# EAGLE board Quest Game Through Hole Single PCB Design (EAGLE 9.7.0)
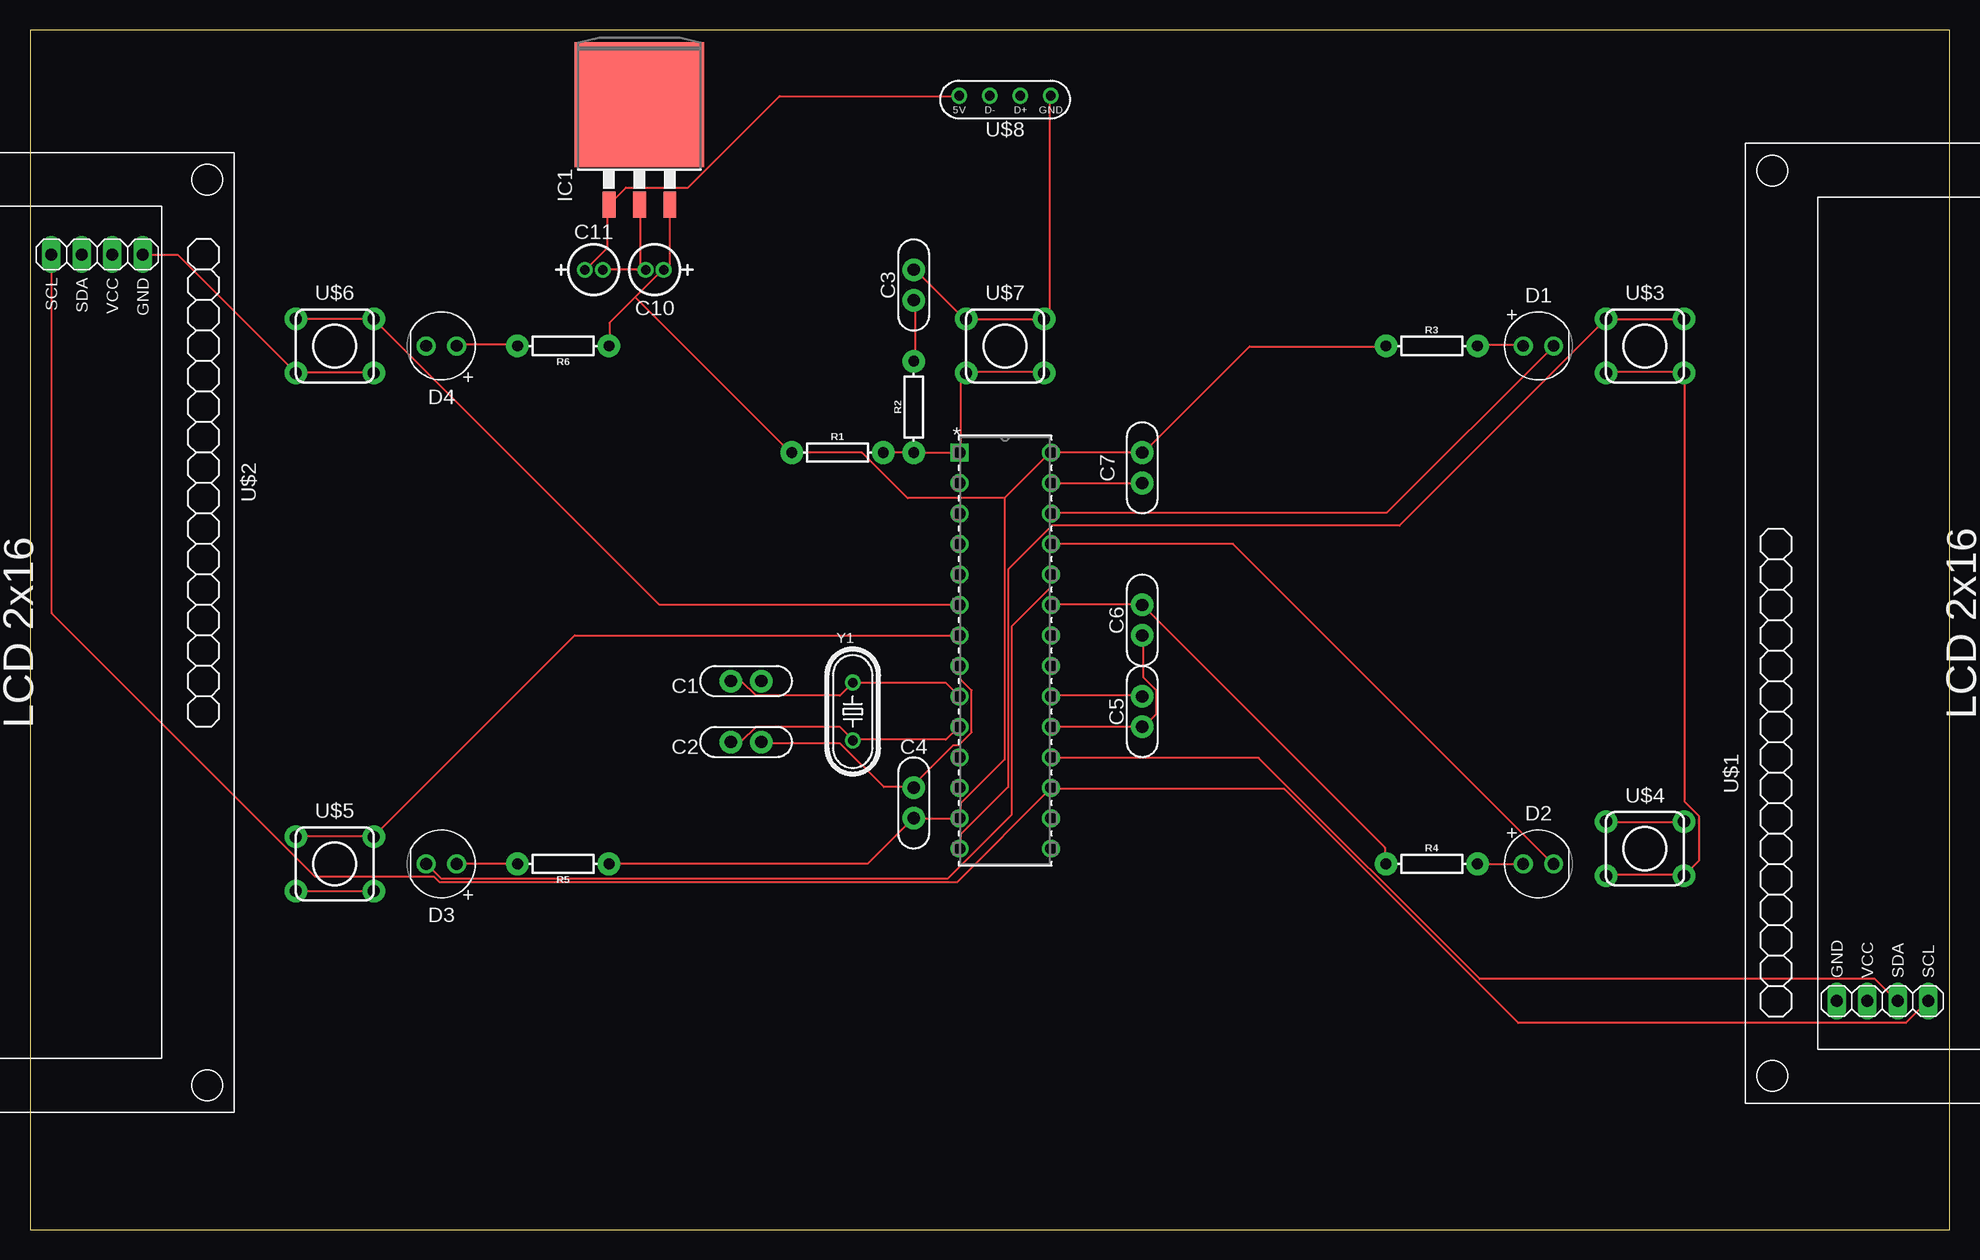
[diagram p0: board, top side]
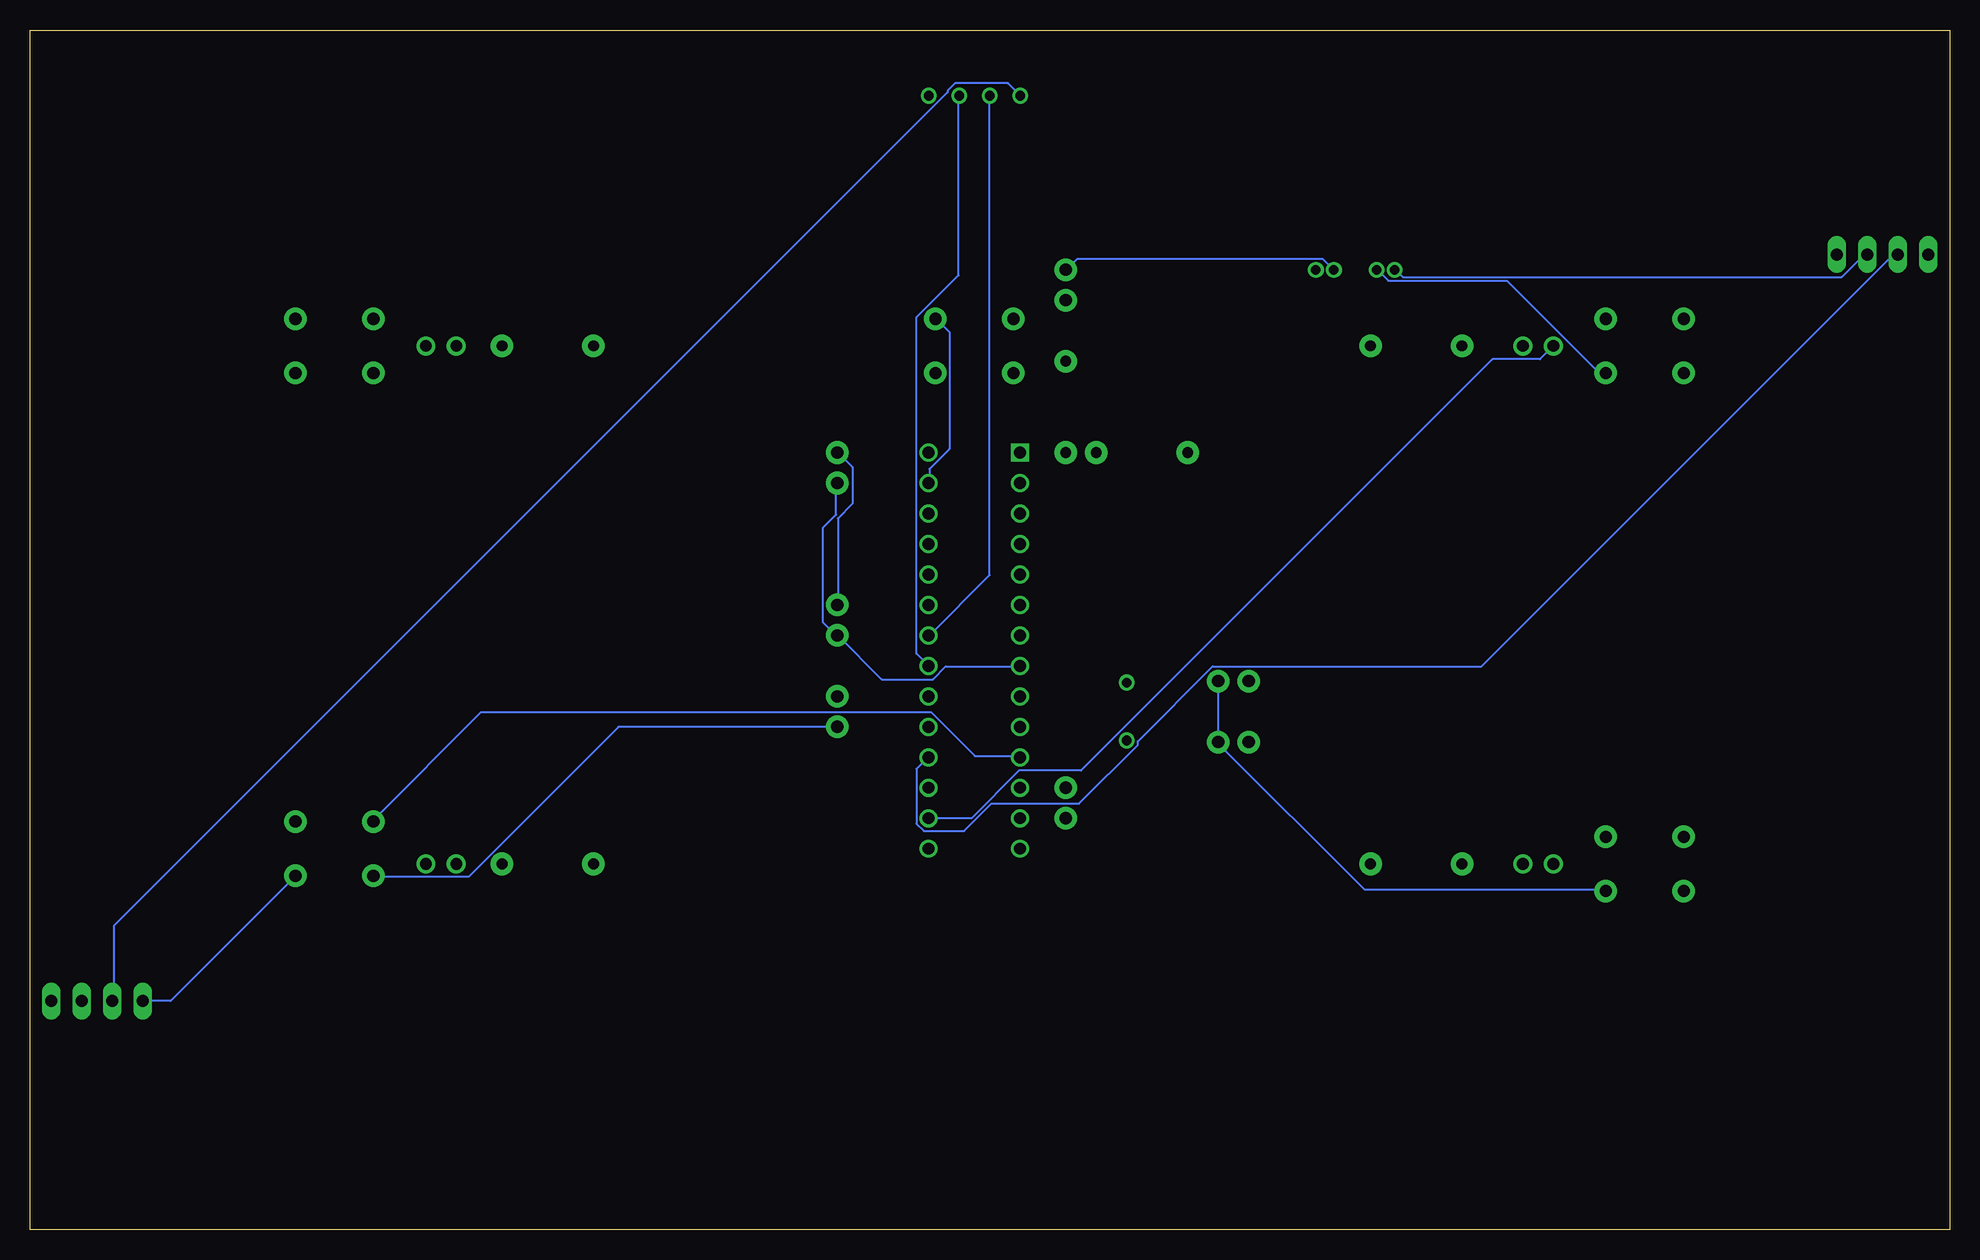
[diagram p1: board, bottom side, seen from below]

Size 160 x 100 mm. Coordinates in mm from the lower left corner, seen from the top.
Outline: 0,0 160,0 160,100 0,100 0,0
Copper layers (1*16): Top / Bottom
Stack-up Default Layer Stack: Top SilkScreen Epoxy Ink / Top SolderMask SR:Green 0.0254mm Dk 4.3 / Top Surface Finish Lead-Free 0.02mm / Top CuFoil:007 0.035mm / Dielectric-1 User Defined 1.5mm / Bottom CuFoil:007 0.035mm / Bottom Surface Finish Lead-Free 0.02mm / Bottom SolderMask SR:Green 0.0254mm Dk 4.3 / Bottom SilkScreen Epoxy Ink
Design rules: minimum copper width 6mil, minimum drill size 0.35mm, copper clearance wire_polygon to wire_polygon 6mil, copper clearance wire_polygon to pad_smd 6mil, copper clearance wire_polygon to via 6mil, copper clearance pad_smd to pad_smd 6mil, copper clearance pad_smd to via 6mil, copper clearance via to via 6mil, copper clearance smd to pad (same net) 6mil, copper clearance smd to via (same net) 6mil, copper clearance smd to smd (same net) 6mil, restrict clearance 0mil, dimension clearance 40mil, via restrict clearance 0mil, drill distance 6mil, keepout clearance 0mil

## Footprints (pad centres in the part's own frame; a part is rotated, then mirrored left to right if it is on the bottom)
CAP-THRU-2.54MM = drill 1.016 pad 1.88: 1 -1.27,0; 2 1.27,0
CAPPRD150W80D400H600B = drill 0.8: 1 -0.75,0; 2 0.75,0
LEDRD254W60D565H860B_W = drill 0.981 pad 1.581: 1 -1.27,0; 2 1.27,0
TO263-3 = smd 1.067 x 2.159: 1 -2.54,-5.791; 2 0,-5.791; 3 2.54,-5.791 | smd 10.8 x 10.41: TAB 0,2.54
AXIAL-0.3 = drill 0.9 pad 1.88: P$1 -3.81,0; P$2 3.81,0
SPDIP28_300MC_MCH = drill 0.991 pad 1.499 square: 1 0,0 | drill 0.991 pad 1.499: 2 0,-2.54; 3 0,-5.08; 4 0,-7.62; 5 0,-10.16; 6 0,-12.7; 7 0,-15.24; 8 0,-17.78; 9 0,-20.32; 10 0,-22.86; 11 0,-25.4; 12 0,-27.94; 13 0,-30.48; 14 0,-33.02; 15 7.62,-33.02; 16 7.62,-30.48; 17 7.62,-27.94; 18 7.62,-25.4; 19 7.62,-22.86; 20 7.62,-20.32; 21 7.62,-17.78; 22 7.62,-15.24; 23 7.62,-12.7; 24 7.62,-10.16; 25 7.62,-7.62; 26 7.62,-5.08; 27 7.62,-2.54; 28 7.62,0
LCD-I2C = drill 1.016 long: 1 -19.05,-5.08; 2 -19.05,-7.62; 3 -19.05,-10.16; 4 -19.05,-12.7
SWITCH-MOMENTARY-PTH-6.5MM = drill 1.016 pad 1.88: 1 -3.251,2.261; 2 3.251,2.261; 3 -3.251,-2.261; 4 3.251,-2.261
USB-A = drill 0.8: 1 -3.81,0; 2 -1.27,0; 3 1.27,0; 4 3.81,0
HC49US = drill 0.813: 1 -2.413,0; 2 2.413,0

## Placement (x,y rotation side)
C1  22pF  [CAP-THRU-2.54MM]  59.69,45.72 0 top
C2  22pF  [CAP-THRU-2.54MM]  59.69,40.64 0 top
C3  104 Ceramic  [CAP-THRU-2.54MM]  73.66,78.74 90 top
C4  104 Ceramic  [CAP-THRU-2.54MM]  73.66,35.56 270 top
C5  106 Ceramic Low ESR  [CAP-THRU-2.54MM]  92.71,43.18 90 top
C6  104 Ceramic  [CAP-THRU-2.54MM]  92.71,50.8 90 top
C7  104 Ceramic  [CAP-THRU-2.54MM]  92.71,63.5 270 top
C10  0.1µF  [CAPPRD150W80D400H600B]  52.07,80.01 180 top
C11  10µF  [CAPPRD150W80D400H600B]  46.99,80.01 0 top
D1  P1 Select Button LED  [LEDRD254W60D565H860B_W]  125.73,73.66 0 top
D2  P1 Next Button LED  [LEDRD254W60D565H860B_W]  125.73,30.48 0 top
D3  P2 Select Button LED  [LEDRD254W60D565H860B_W]  34.29,30.48 180 top
D4  P2 Next Button LED  [LEDRD254W60D565H860B_W]  34.29,73.66 180 top
IC1  LD1117_TO263  [TO263-3]  50.8,91.24 0 top
R1  10kΩ  [AXIAL-0.3]  67.31,64.77 0 top
R2  1kΩ  [AXIAL-0.3]  73.66,68.58 90 top
R3  470Ω  [AXIAL-0.3]  116.84,73.66 0 top
R4  470Ω  [AXIAL-0.3]  116.84,30.48 0 top
R5  470Ω  [AXIAL-0.3]  44.45,30.48 180 top
R6  470Ω  [AXIAL-0.3]  44.45,73.66 180 top
U1  PIC32MX270F256B-50I/SPSPDIP28_300MC_MCH  [SPDIP28_300MC_MCH]  77.47,64.77 0 top
U$1  LCD-16X2-I2CSUNFOUNDER-IIC  [LCD-I2C]  145.52,38.1 90 top
U$2  LCD-16X2-I2CSUNFOUNDER-IIC  [LCD-I2C]  14.48,62.23 270 top
U$3  P1 Select Button  [SWITCH-MOMENTARY-PTH-6.5MM]  134.62,73.66 0 top
U$4  P1 Next Button  [SWITCH-MOMENTARY-PTH-6.5MM]  134.62,31.75 0 top
U$5  P2 Select Button  [SWITCH-MOMENTARY-PTH-6.5MM]  25.4,30.48 0 top
U$6  P2 Next Button  [SWITCH-MOMENTARY-PTH-6.5MM]  25.4,73.66 0 top
U$7  Reset Switch  [SWITCH-MOMENTARY-PTH-6.5MM]  81.28,73.66 0 top
U$8  USB-A-CABLE_PTH  [USB-A]  81.28,94.52 180 top
Y1  16MHZ  [HC49US]  68.58,43.18 90 top

## Library data of the parts
C1-C7 IC1 U$1-U$8 = Tinkercad
C10 C11 = Capacitor; CATEGORY_L1: Capacitor; CATEGORY_L2: Aluminum Electrolytic Capacitors; CATEGORY_L3: Radial Can; DESCRIPTION: Radial Polarized Capacitor, 0.059" (1.50mm) pitch, 0.157" Dia (4.00mm) body diameter, 0.236" (6.00mm) body height; PACKAGE: Through Hole
D1-D4 = Tinkercad; CATEGORY: Opto-Electronic; SUB-CATEGORY: LED
R1 R2 = SparkFun-Resistors
R3-R6 = SparkFun-Resistors; PROD_ID: RES-12182
U1 = 2026-07-08_23-41-48_Library; COPYRIGHT: Copyright (C) 2026 Ultra Librarian. All rights reserved.; MANUFACTURER_NAME: Microchip; MANUFACTURER_PART_NUMBER: PIC32MX270F256B-50I/SP
Y1 = OPL_Crystal Oscillator; MPN: HC-49US 16.000MHz

## Nets
+3.3V: C4.2 C6.2 C7.1 C10.1 IC1.3 R1.P$1 R3.P$1 R4.P$1 R5.P$1 R6.P$1 U1.13 U1.23 U1.28
+5V: C11.1 IC1.1 U$1.2 U$2.2 U$8.4
GND: C1.2 C2.2 C3.2 C4.1 C5.1 C6.1 C7.2 C10.2 C11.2 IC1.2 U1.8 U1.19 U1.27 U$1.1 U$2.1 U$3.3 U$3.4 U$4.3 U$4.4 U$5.3 U$5.4 U$6.3 U$6.4 U$7.1 U$7.2 U$8.1
N$1: C1.1 U1.9 Y1.2
N$2: C2.1 U1.10 Y1.1
N$3: U1.14 U$3.1 U$3.2
N$4: C3.1 R2.P$2
N$5: C5.2 U1.20
N$6: R1.P$2 R2.P$1 U1.1 U$7.3 U$7.4
N$7: D3.1 R5.P$2
N$8: U1.11 U$4.1 U$4.2
N$9: D4.1 R6.P$2
N$10: U1.7 U$5.1 U$5.2
N$11: D3.2 U1.24
N$12: U1.6 U$6.1 U$6.2
N$13: D4.2 U1.16
N$14: U1.17 U$1.4 U$2.4
N$15: U1.18 U$1.3 U$2.3
N$17: U1.21 U$8.2
N$18: U1.22 U$8.3
N$19: D1.2 U1.26
N$20: D1.1 R3.P$2
N$21: D2.1 R4.P$2
N$22: D2.2 U1.25
VBUS: U1.15

## Tracks (layer width: path | path; a pad name or v marks a point on that pad's centre or on a via)
+3.3V
  Top 0.152: U1.23 85.19,52.12 92.66,52.12 C6.2 112.93,31.85 112.93,30.48 R4.P$1 | IC1.3 53.34,80.47 52.88,80.01 C10.1 52.73,80.01 50.44,77.72 | 50.44,77.72 48.31,75.59 48.31,73.76 R6.P$1 | 50.44,77.72 63.4,64.77 R1.P$1 69.34,64.77 73.15,60.96 81.23,60.96 | R5.P$1 69.8,30.48 73.61,34.29 C4.2 U1.13 77.57,34.29 77.57,35.51 81.23,39.17 81.23,60.96 | R3.P$1 112.93,73.61 101.65,73.61 92.81,64.77 C7.1 U1.28 85.04,64.77 81.23,60.96
  Bottom 0.152: C6.2 92.66,52.12 92.66,59.28 91.44,60.5 91.44,63.55 92.66,64.77 C7.1
+5V
  Top 0.152: C11.1 46.33,80.01 48.16,81.84 48.16,85.34 IC1.1 48.31,85.5 49.68,86.87 54.86,86.87 62.48,94.49 77.42,94.49 U$8.4
  Bottom 0.152: U$1.2 153.01,19.05 153.01,25.3 83.52,94.79 83.52,94.94 82.91,95.56 78.49,95.56 77.57,94.64 U$8.4 | U$2.2 6.86,81.23 7.16,81.23 8.99,79.4 45.57,79.4 46.18,80.01 C11.1
GND
  Top 0.152: U$5.3 22.25,28.19 28.65,28.19 U$5.4 | U1.8 77.57,46.94 77.57,45.87 78.49,44.96 78.49,41.45 77.42,40.39 76.96,40.39 73.76,37.19 73.76,36.88 C4.1 73.61,36.88 71.17,36.88 67.51,40.54 60.96,40.54 C2.2 | U$3.3 131.37,71.48 137.77,71.48 U$3.4 137.92,71.32 137.92,35.66 139.14,34.44 139.14,30.79 137.92,29.57 U$4.4 137.77,29.57 131.37,29.57 U$4.3 | U$2.1 9.45,81.23 12.34,81.23 22.1,71.48 U$6.3 22.25,71.48 28.65,71.48 U$6.4 | U1.27 85.19,62.18 92.66,62.18 C7.2 | U1.19 C5.1 92.81,41.91 93.88,42.98 93.88,44.96 92.81,46.02 92.81,49.53 C6.1 | U$8.1 85.04,94.49 85.04,76.5 84.58,76.05 U$7.2 84.43,75.89 78.03,75.89 U$7.1 78.03,76.05 77.72,76.05 73.76,80.01 C3.2 | 50.9,80.31 50.9,85.34 IC1.2 | 50.9,80.31 51.21,80.01 C10.2 50.9,80.31 | C11.2 50.6,80.01 50.9,80.31
  Bottom 0.152: C1.2 C2.2 60.96,40.54 48.77,28.35 28.65,28.35 U$5.4 | U$1.1 148.28,19.05 137.92,29.41 U$4.4 | C7.2 92.81,62.18 92.81,59.59 93.88,58.52 93.88,50.6 92.81,49.53 C6.1 92.66,49.53 89,45.87 84.73,45.87 83.67,46.94 77.57,46.94 U1.8 | C10.2 51.36,80.01 52.27,80.92 72.69,80.92 73.61,80.01 C3.2 | U1.27 85.04,62.33 85.04,63.4 83.36,65.08 83.36,74.83 84.43,75.89 U$7.2 | U$6.4 28.65,71.48 29.26,71.48 36.88,79.1 46.79,79.1 47.7,80.01 C11.2 | C5.1 110.95,41.91 123.44,29.41 131.37,29.41 U$4.3
N$1
  Top 0.152: 68.58,45.57 76.35,45.57 U1.9 | C1.1 59.28,45.72 60.5,44.5 67.51,44.5 68.58,45.57 | 68.58,45.57 Y1.2
N$2
  Top 0.152: 68.58,40.84 76.35,40.84 77.42,41.91 U1.10 | 68.58,40.84 67.51,41.91 60.5,41.91 59.28,40.69 58.52,40.69 C2.1 | 68.58,40.84 Y1.1
N$3
  Top 0.152: 131.37,75.89 114.15,58.67 85.19,58.67 81.53,55.02 81.53,36.88 77.57,32.92 77.57,31.85 U1.14 | 131.37,75.89 137.77,75.89 U$3.2 | 131.37,75.89 U$3.1
N$4
  Top 0.152: R2.P$2 73.76,72.39 73.76,77.42 C3.1
N$5
  Top 0.152: U1.20 85.19,44.5 92.66,44.5 C5.2
N$6
  Top 0.152: R1.P$2 R2.P$1 U1.1 77.57,64.77 77.57,70.87 78.03,71.32 U$7.3 78.03,71.48 84.43,71.48 U$7.4
N$7
  Top 0.152: R5.P$2 D3.1
N$8
  Top 0.152: U$4.2 137.77,33.98 131.37,33.98 U$4.1
  Bottom 0.152: U1.11 77.57,39.47 81.23,39.47 84.89,43.13 122.38,43.13 131.37,34.14 U$4.1
N$9
  Top 0.152: D4.1 35.66,73.76 40.54,73.76 R6.P$2
N$10
  Top 0.152: U1.7 45.41,49.53 28.65,32.77 | 28.65,32.77 22.25,32.77 U$5.1 | 28.65,32.77 U$5.2
N$11
  Top 0.152: U1.24 85.04,54.56 85.04,53.49 81.84,50.29 81.84,34.59 76.5,29.26 34.29,29.26 33.07,30.48 D3.2
N$12
  Top 0.152: 28.65,75.89 52.43,52.12 77.42,52.12 U1.6 | 28.65,75.89 22.25,75.89 U$6.1 | 28.65,75.89 U$6.2
N$13
  Bottom 0.152: U1.16 81.53,34.29 77.57,38.25 72.39,38.25 38.1,72.54 34.14,72.54 D4.2
N$14
  Top 0.152: U$1.4 158.19,19.05 156.36,17.22 124.05,17.22 104.55,36.73 85.19,36.73 U1.17 85.04,36.73 77.27,28.96 34.14,28.96 33.68,29.41 23.77,29.41 1.83,51.36 1.83,81.23 U$2.4
N$15
  Top 0.152: U1.18 85.19,39.32 102.41,39.32 120.85,20.88 153.77,20.88 155.6,19.05 U$1.3
  Bottom 0.152: U$2.3 4.42,81.23 4.72,81.23 39.01,46.94 61.42,46.94 67.67,40.69 67.67,40.39 72.54,35.51 79.86,35.51 82.14,33.22 85.5,33.22 86.11,33.83 86.11,38.41 85.19,39.32 U1.18
N$17
  Bottom 0.152: U1.21 86.11,48.01 86.11,76.05 82.6,79.55 82.6,94.49 U$8.2
N$18
  Bottom 0.152: U$8.3 80.01,54.56 85.04,49.53 U1.22
N$19
  Top 0.152: D1.2 113.08,59.74 85.19,59.74 U1.26
N$20
  Top 0.152: D1.1 124.36,73.76 120.7,73.76 R3.P$2
N$21
  Top 0.152: R4.P$2 D2.1
N$22
  Top 0.152: U1.25 100.28,57.15 126.95,30.48 D2.2